# EAGLE board MPU6050_other (EAGLE 9.6.2)
REV: B
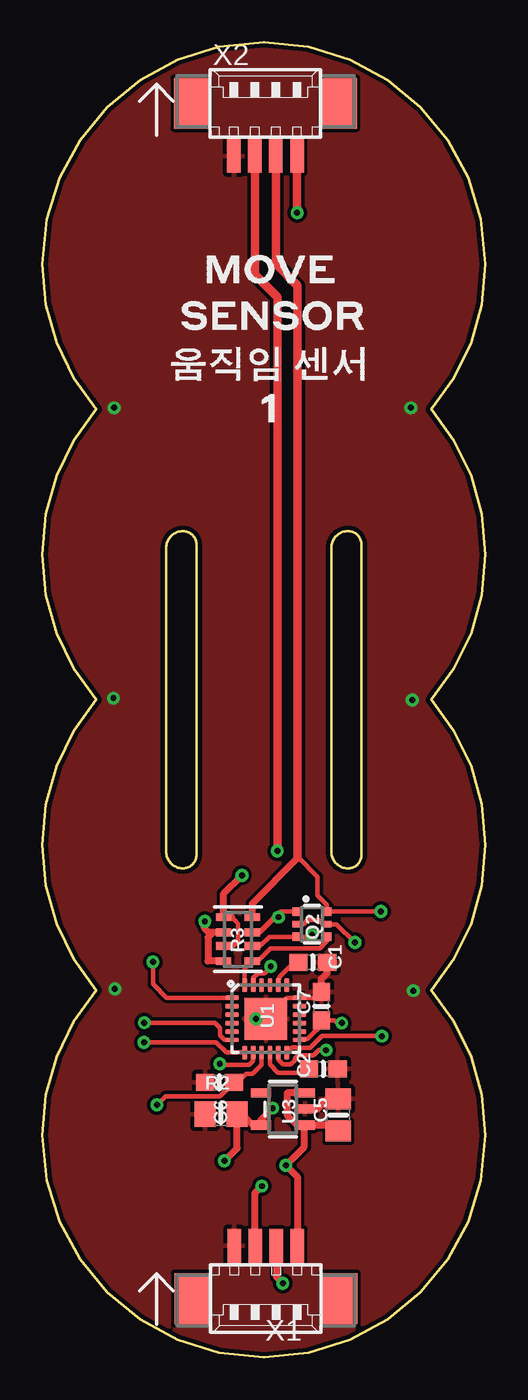
[diagram p0: board, top side]
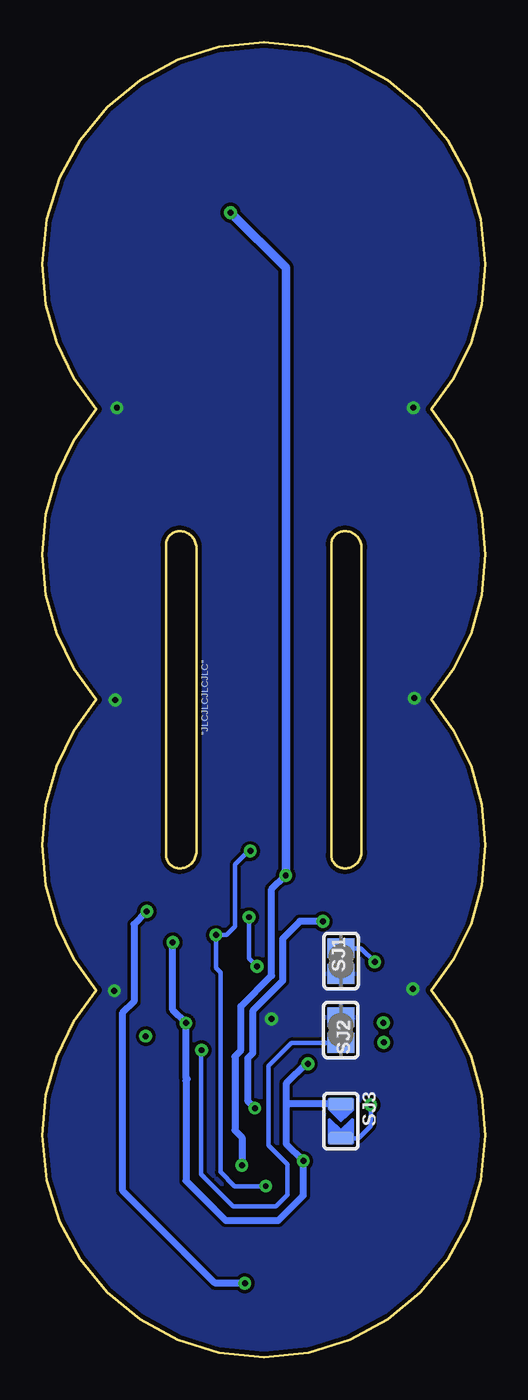
[diagram p1: board, bottom side, seen from below]

Size 26.31 x 78 mm. Coordinates in mm from the lower left corner, seen from the top.
Outline: 9.16,48.2 9.16,29.8 arc-90 8.36,29 arc-90 7.36,30 7.36,48 arc-90 8.36,49 arc-90 9.16,48.2
Outline: 18.16,49 arc-90 18.96,48.2 18.96,29.8 arc-90 18.16,29 arc-90 17.16,30 17.16,48 arc-90 18.16,49
Outline: 23.09,21.77 24.44,23.63 25.45,25.71 26.09,27.97 26.31,30.39 26.09,32.8 25.45,35.06 24.44,37.14 23.09,39 24.44,40.86 25.45,42.94 26.09,45.2 26.31,47.61 26.09,50.03 25.45,52.29 24.44,54.37 23.09,56.23 24.44,58.09 25.45,60.17 26.09,62.43 26.31,64.84 26.05,67.5 25.28,69.97 24.07,72.2 22.46,74.15 20.51,75.75 18.28,76.97 15.81,77.73 13.16,78 10.51,77.73 8.04,76.97 5.8,75.75 3.85,74.15 2.25,72.2 1.03,69.97 0.27,67.5 0,64.84 0.22,62.43 0.86,60.17 1.87,58.09 3.22,56.23 1.87,54.37 0.86,52.29 0.22,50.03 0,47.61 0.22,45.2 0.86,42.94 1.87,40.86 3.22,39 1.87,37.14 0.86,35.06 0.22,32.8 0,30.39 0.22,27.97 0.86,25.71 1.87,23.63 3.22,21.77 1.87,19.91 0.86,17.83 0.22,15.57 0,13.16 0.27,10.5 1.03,8.04 2.25,5.8 3.85,3.85 5.8,2.25 8.04,1.03 10.51,0.27 13.16,0 15.81,0.27 18.28,1.03 20.51,2.25 22.46,3.85 24.07,5.8 25.28,8.04 26.05,10.5 26.31,13.16 26.09,15.57 25.45,17.83 24.44,19.91 23.09,21.77
Copper layers (1*16): Top 0.035mm / dielectric 1.5mm / Bottom 0.035mm
Design rules "adafruit 7-7": minimum track width 6mil, minimum drill 15.5mil, track to track 8mil, track to pad 7mil, pad to pad 7mil, via to via 7mil, smd to smd 7mil, copper to edge 10mil, drill to drill 8mil, minimum pad ring 10mil, minimum via ring 8mil, stop-mask expansion 2mil, vias tented up to drill 20mil, thermal gap 10mil
Net classes: 1 highpower: width 0.406 mm, drill 0.483 mm; 2 lowpower: width 0.305 mm, drill 0.483 mm

## Footprints (pad centres in the part's own frame; a part is rotated, then mirrored left to right if it is on the bottom)
0603-NO = smd 1.075 x 1: 1 -0.85,0; 2 0.85,0
0805-NO = smd 1.24 x 1.5: 1 -0.95,0; 2 0.95,0
SOT363 = smd 0.5 x 0.5: 1 -0.75,-0.9; 3 0.75,-0.9; 4 0.75,0.9; 6 -0.75,0.9 | smd 0.4 x 0.5: 2 0,-0.9; 5 0,0.9
RESPACK_4X0603 = smd 0.45 x 0.9: 1 -1.3,-0.85; 2 -0.4,-0.85; 3 0.4,-0.85; 4 1.3,-0.85; 5 1.3,0.85; 6 0.4,0.85; 7 -0.4,0.85; 8 -1.3,0.85
SOLDERJUMPER_CLOSEDWIRE = smd 1.168 x 1.6: 1 -0.762,0; 2 0.762,0 | smd 0.635 x 0.203: WIRE 0,0
SOLDERJUMPER_ARROW_NOPASTE = smd 0.762 x 1.524: 1 -1.016,0; 2 1.016,0
QFN24_4MM_SMSC = smd 0.8 x 0.28: 1 -2,1.25; 2 -2,0.75; 3 -2,0.25; 4 -2,-0.25; 5 -2,-0.75; 6 -2,-1.25; 13 2,-1.25; 14 2,-0.75; 15 2,-0.25; 16 2,0.25; 17 2,0.75; 18 2,1.25 | smd 0.28 x 0.8: 7 -1.25,-2; 8 -0.75,-2; 9 -0.25,-2; 10 0.25,-2; 11 0.75,-2; 12 1.25,-2; 19 1.25,2; 20 0.75,2; 21 0.25,2; 22 -0.25,2; 23 -0.75,2; 24 -1.25,2 | smd 2.5 x 2.5: THERM 0,0
SOT23-5 = smd 0.55 x 1.2: 1 -0.95,-1.3; 2 0,-1.3; 3 0.95,-1.3; 4 0.95,1.3; 5 -0.95,1.3
53261-04 = smd 0.8 x 2: 1 1.875,-2.5; 2 0.625,-2.5; 3 -0.625,-2.5; 4 -1.875,-2.5 | smd 2.1 x 3: S1 4.375,0.625; S2 -4.375,0.625

## Placement (x,y rotation side)
C1  2.2nF  [0603-NO]  16.07,23.43 0 top
C2  0.1uF  [0603-NO]  16.69,17.1 0 top
C5  10uF  [0805-NO]  17.56,14.38 90 top
C6  10uF  [0805-NO]  10.62,14.42 180 top
C7  0.1uF  [0603-NO]  16.57,20.82 90 top
Q2  BSS138  [SOT363]  16.01,25.69 270 top
R2  10K  [0603-NO]  10.53,16.3 180 top
R3  10K  [RESPACK_4X0603]  11.62,24.8 270 top
SJ1  CLKIN  [SOLDERJUMPER_CLOSEDWIRE]  8.57,23.5 90 bottom
SJ2  FSYNC  [SOLDERJUMPER_CLOSEDWIRE]  8.59,19.41 270 bottom
SJ3  [SOLDERJUMPER_ARROW_NOPASTE]  8.58,14.01 270 bottom
U1  MPU-6050  [QFN24_4MM_SMSC]  13.27,20.08 0 top
U3  AP2112K-3.3  [SOT23-5]  14.29,14.73 90 top
X1  53261-04  [53261-04]  13.27,4.12 180 top
X2  53261-04  [53261-04]  13.25,73.75 0 top

## Library data of the parts
C1 C2 C5-C7 Q2 R2 R3 SJ1 SJ2 U1 U3 = microbuilder
SJ3 = microbuilder; BOM: EXCLUDE
X1 X2 = con-molex; MF: MOLEX; OC_FARNELL: 1125374; OC_NEWARK: unknown

## Nets
3.3V: C6.1 C7.1 Q2.2 Q2.5 R3.2 R3.4 SJ3.1 U1.8 U1.13 U3.5
AD0: R2.1 SJ3.2 U1.9
CLKIN: SJ1.2 U1.1
CPOUT: C1.1 U1.20
FSYNC_IN: SJ2.2 U1.11
GND: C1.2 C2.2 C5.2 C6.2 C7.2 R2.2 SJ1.1 SJ2.1 U1.18 U1.THERM U3.2 X1.1 X2.4
INT: U1.12
REGOUT: C2.1 U1.10
SCL: Q2.6 R3.8 X1.3 X2.2
SCL_3V: Q2.1 R3.7 U1.23
SCL_EXT: U1.7
SDA: Q2.3 R3.6 X1.2 X2.3
SDA_3V: Q2.4 R3.5 U1.24
SDA_EXT: U1.6
VCC [highpower]: C5.1 R3.1 R3.3 U3.1 U3.3 X1.4 X2.1

## Tracks (layer width: path | path; a pad name or v marks a point on that pad's centre or on a via)
3.3V  (via drill 0.35)
  Top 0.254: U1.8 12.52,17.59 12.27,17.35 10.6,17.35 v10.54,17.41 | Q2.2 15.5,25.69 15.75,25.94 16.41,25.94 16.66,25.69 Q2.5 17.48,25.69 v18.56,24.61 | U1.13 15.33,18.88 15.76,18.88 16.29,19.42 16.29,19.4 16.57,19.68 C7.1 17.34,19.97 17.48,19.83 v17.78,19.83 | 11.54,14.35 C6.1
  Top 0.406: v13.69,14.78 12.99,14.08 U3.5 12.49,13.78 11.92,14.35 11.54,14.35 11.57,14.38 C6.1 11.57,12.41 v10.82,11.66 v10.82,11.65 | R3.4 9.84,23.5 9.84,24.9 10.01,25.07 9.89,25.2 | R3.2 9.89,25.2 | 9.89,25.2 9.65,25.43 v9.65,25.85
  Bottom 0.254: 17.79,16.59 17.7,16.5
  Bottom 0.406: v13.69,14.78 14.12,15.21 14.12,17.73 13.82,18.04 13.82,20.55 12.04,22.33 12.04,24.82 11.04,25.82 11.04,25.85 v9.65,25.85 | 17.7,16.5 17.77,16.42 17.77,10.48 15.43,8.13 12.3,8.13 10.82,9.61 v10.82,11.65 11.83,12.66 11.83,15.12 | v10.54,17.41 10.67,17.41 11.83,16.25 11.83,15.12 | SJ3.1 11.73,15.03 11.83,15.12 | v18.56,24.61 18.56,20.61 v17.78,19.83 v17.79,19.82 17.79,16.59
AD0  (via drill 0.35)
  Top 0.254: U1.9 13.02,17.35 12.48,16.81 12.09,16.81 11.58,16.3 R2.1 10.57,15.49 7.33,15.49 v6.81,14.98
  Bottom 0.254: 8.52,13.13 8.58,13.06 SJ3.2 7.54,12.99 6.81,13.72 v6.81,14.98
CLKIN  (via drill 0.35)
  Top 0.254: U1.1 7.39,21.33 6.57,22.14 v6.57,23.45
  Bottom 0.254: SJ1.2 7.4,24.27 v6.57,23.45
CPOUT
  Top 0.254: U1.20 14.02,22.46 14.08,22.51 14.08,22.56 14.94,23.43 C1.1
FSYNC_IN  (via drill 0.35)
  Top 0.254: U1.11 14.03,17.64 14.3,17.36 14.74,17.36 15,17.62 15,17.73 15.17,17.91 16.11,17.91 16.42,18.22 v16.85,18.22
  Bottom 0.254: v16.85,18.22 16.89,18.18 16.89,10.86 15,8.96 12.42,8.96 11.75,9.64 11.75,11.44 12.89,12.58 12.89,17.28 11.52,18.65 SJ2.2
GND  (via drill 0.35)
  Top 0.254: v12.7,20.08 U1.THERM 14.52,21.33 U1.18 16.22,21.33 C7.2
  Top 0.406: U3.2 16.34,14.73 16.93,15.33 C5.2 | C7.2 16.57,22.44 16.92,22.78 C1.2
  other vias: 4.23,39.09 4.28,56.32 21.87,56.32 21.97,38.99 22.03,21.74 4.31,21.85
  pour Top: -4.22,79.12 31.18,79.12 31.18,-0.04 -4.22,-0.04
  pour Bottom: -4.22,79.28 31.18,79.28 31.18,-0.04 -4.22,-0.04
INT  (via drill 0.35)
  Top 0.254: U1.12 14.82,18.37 15.08,18.37 15.91,18.37 16.61,19.07 20.17,19.07
  Top 0.406: 20.17,19.07 v20.17,19.05
REGOUT
  Top 0.254: C2.1 15.62,16.88 14.01,16.88 13.52,17.37 U1.10
SCL  (via drill 0.35)
  Top 0.254: 12.47,26.28 R3.8 | v20.1,26.44 Q2.6 16.91,26.82 16.35,27.39 16.35,28.51 15.19,29.67 15.17,29.69
  Top 0.406: R3.8 12.47,26.91 15.17,29.61 15.17,29.69 | 15.19,29.67 15.19,29.58 | X1.3 13.9,4.78 v14.28,4.4
  Top 0.508: 15.17,29.69 15.17,63.56 13.87,64.85 X2.2
  Bottom 0.406: v14.28,4.4 16.04,4.4 21.52,9.88 21.52,20.45 20.86,21.1 20.86,25.68 v20.1,26.44
SCL_3V  (via drill 0.35)
  Top 0.254: v14.03,26.11 13.78,26.11 12.87,25.2 R3.7 12.92,25.2 14.16,26.44 Q2.1 | U1.23 12.53,22.51 12.8,22.78 13.18,22.78 13.56,23.16 v13.56,23.18
  Bottom 0.254: v14.03,26.11 14.03,23.65 v13.56,23.18
SCL_EXT  (via drill 0.35)
  Top 0.254: U1.7 10.93,18.08 10.33,18.67 v6.04,18.67
SDA  (via drill 0.35)
  Top 0.254: R3.6 12.94,24.4 13.49,24.95 16,24.95 v16,25.05 15.94,24.95 Q2.3
  Top 0.406: X1.2 12.65,9.76 v13.04,10.16 | 13.92,30.07 v13.96,30.03
  Top 0.508: X2.3 12.62,64.21 13.96,62.88 v13.96,30.03
  Bottom 0.254: v13.96,30.03 14.07,30.03 14.86,29.24 14.86,25.56 15.37,25.05 v16,25.05 16,23.09 15.74,22.83 15.74,11 14.89,10.16 v13.04,10.16
SDA_3V
  Top 0.254: U1.24 12.02,23.05 R3.5 12.8,23.5 13.56,24.26 16.49,24.26 16.91,24.68 Q2.4
SDA_EXT  (via drill 0.35)
  Top 0.254: U1.6 10.83,18.83 10.56,19.09 10.56,19.53 10.25,19.84 v6.06,19.84
VCC  (via drill 0.35)
  Top 0.254: R3.3 11.37,24.4 11.64,24.67 11.64,25.71 11.51,25.84 11.25,26.1
  Top 0.406: U3.3 14.54,15.68 14.54,14.36 15.12,13.78 U3.1 | U3.1 17.71,13.78 C5.1 | v11.86,28.59 10.77,27.5 R3.1 11.25,26.1 | U3.1 15.57,13.76 15.57,12.5 v14.46,11.39 15.15,10.7 X1.4
  Top 0.508: 14.47,11.38 v14.46,11.39 | v15.13,67.89 v15.12,67.9 X2.1
  Bottom 0.406: v11.86,28.59 11.87,28.59 12.69,27.77 12.69,22.64 14.51,20.82 14.51,18.21 14.87,17.85 14.87,13.47 14.46,13.06 v14.46,11.39
  Bottom 0.508: v11.86,28.59 11.86,64.61 v15.13,67.89

## Text on the board
bPlace: "JLCJLCJLCJLC"